# Altium PCB PCB.PcbDoc
Units mm, origin at the board's own origin, x right, y up, seen from the top; angles counter-clockwise.
Board outline 200 x 100 mm, 2 copper layers (Top Layer, Bottom Layer); 48 components, 33 nets, 146 pads, 0 vias.
Unrouted connection lines stored in the file: 95.
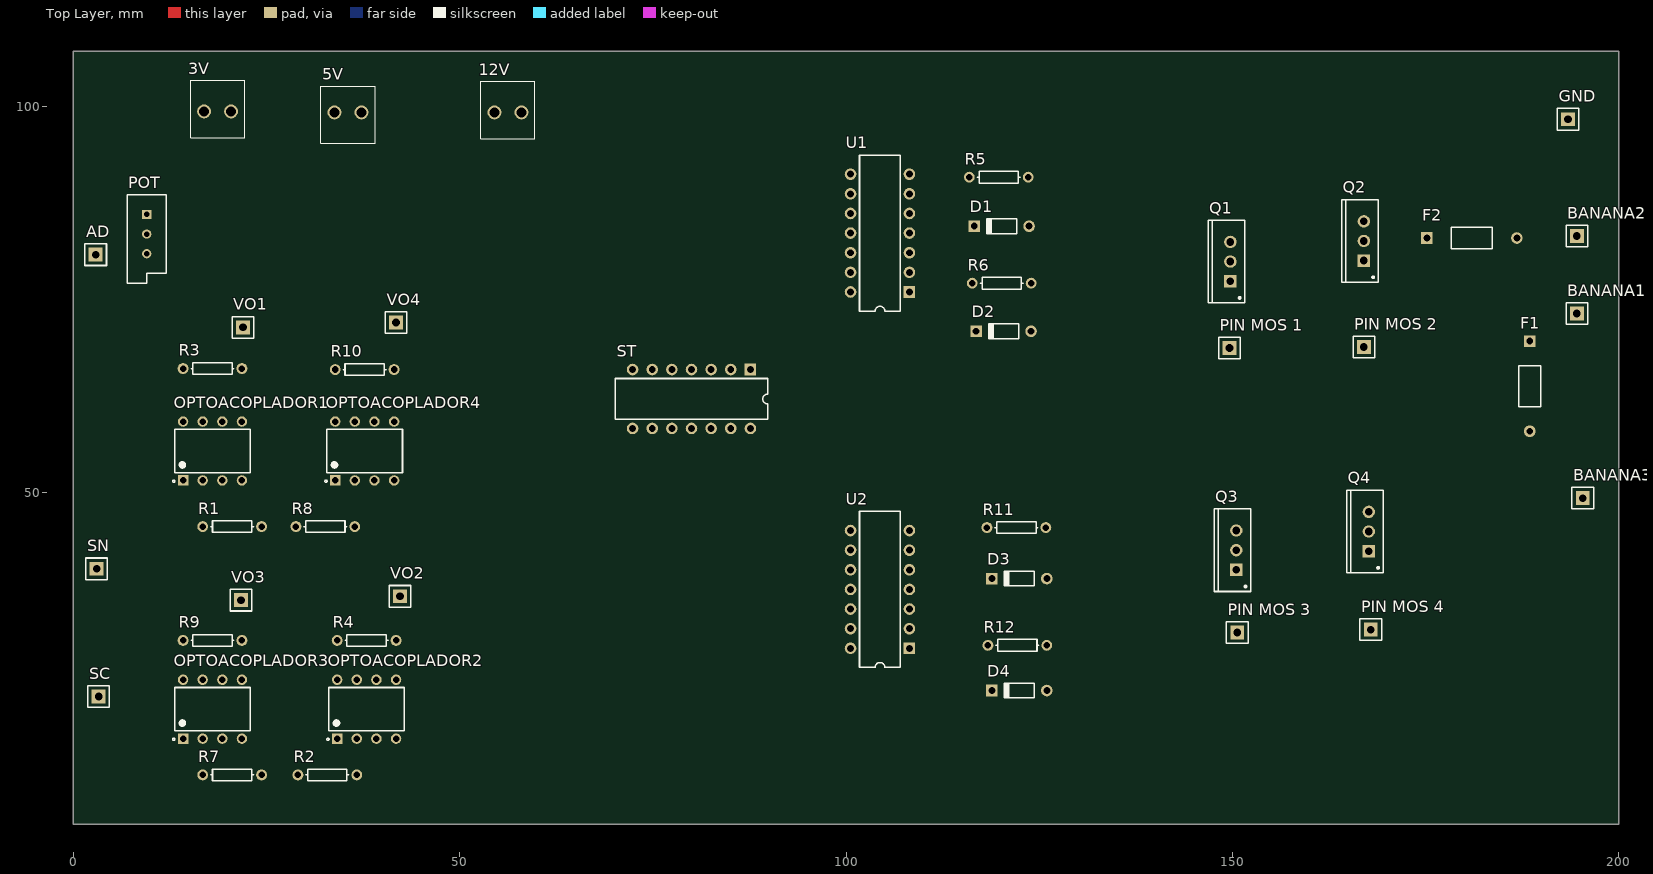
[diagram p0: Top Layer view]
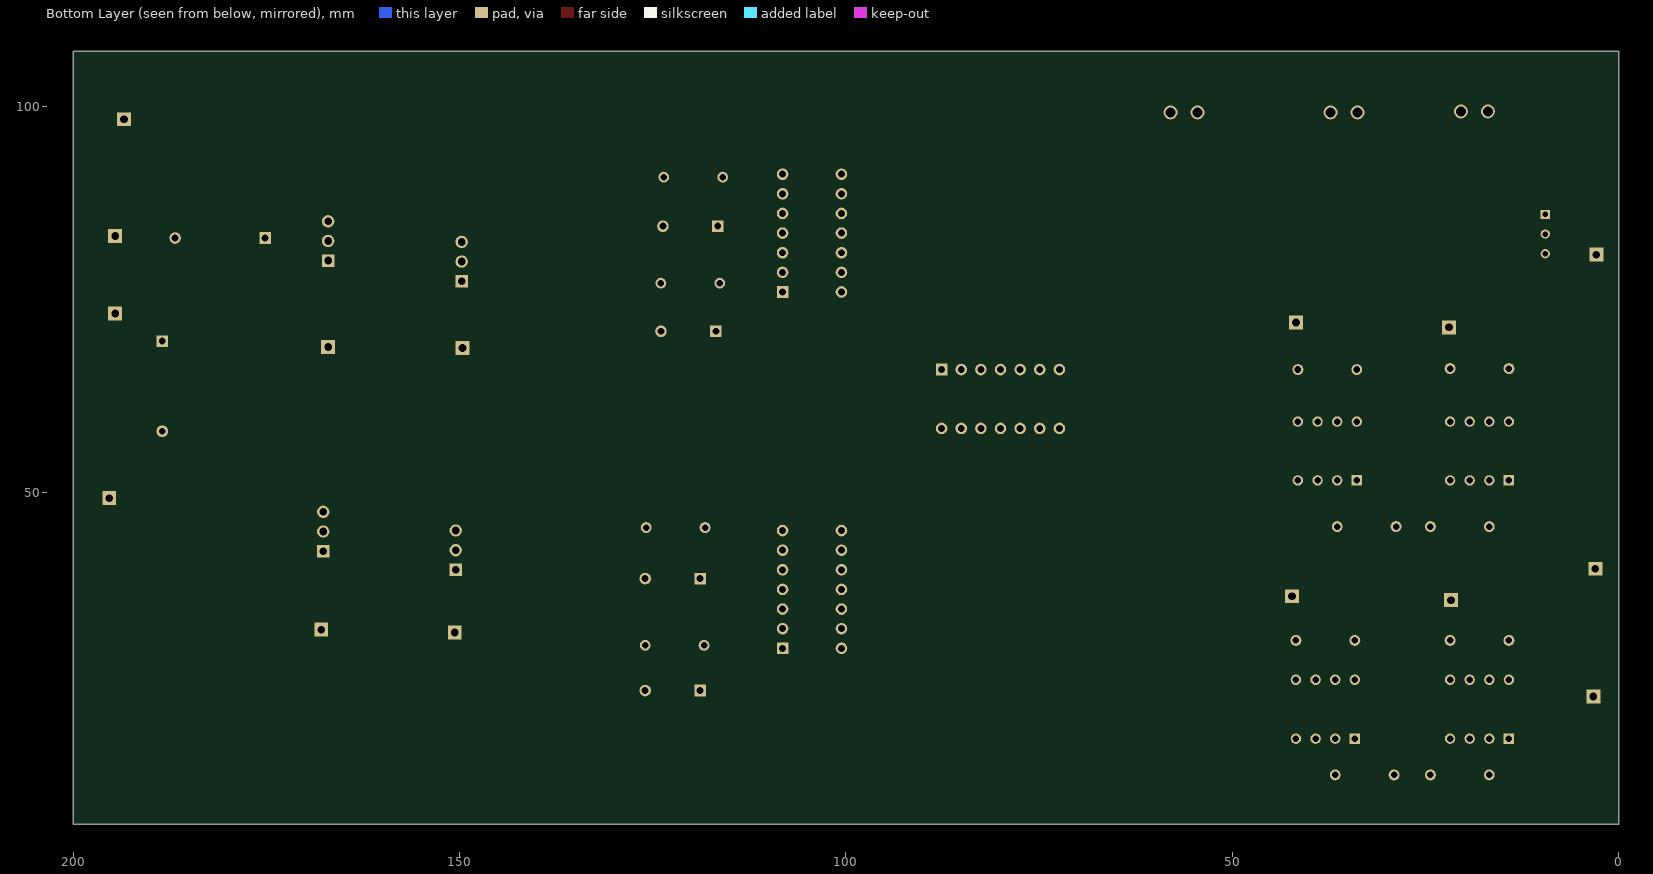
[diagram p1: Bottom Layer view, seen from below]

## Layer stack, top to bottom
Top Solder: solder mask 0.0102, Solder Resist, Dk 3.5
Top Layer: signal copper 0.0356
Dielectric 1: dielectric 0.32, FR-4, Dk 4.8
Bottom Layer: signal copper 0.0356
Bottom Solder: solder mask 0.0102, Solder Resist, Dk 3.5

## Board outline
0,7.112 200,7.112 200,107.112 0,107.112

## Design rules (kind name [scope] priority, off if disabled: settings)
Clearance [All] p1: gap=0.5 ignorepadtopadclearanceinfootprint=FALSE
PolygonConnect [All] p1: connectstyle=Relief reliefconductorwidth=0.254 reliefentries=4 polygonreliefangle="90 Angle" airgapwidth=0.254
RoutingVias [All] p1: holewidth=0.711 width=1.27 viastyle="Through Hole" minholewidth=0.711 minwidth=1.27 maxholewidth=0.711 maxwidth=1.27
SolderMaskExpansion [All] p1: expansion=0.102
Width [All] p1: maxlimit=5 minlimit=0.8 preferedwidth=0.8
30 further rules are at their usual default settings.

## Components (designator, comment, footprint, x,y, rotation, side; value= is the part's Value field where it differs from the comment)
3V "WE-Terminal Blocks Screw Type 691214110002" 691214110002 18.697,99.314 r0 top
5V "WE-Terminal Blocks Screw Type 691214110002" 691214110002 35.56,99.187 r180 top
12V "WE-Terminal Blocks Screw Type 691214110002" 691214110002 56.261,99.187 r0 top
AD "Connector" "1x1x2.54 Pin Header TH V" 2.921,80.772 r0 top
BANANA1 "Connector" "1x1x2.54 Pin Header TH V" 194.564,73.152 r90 top
BANANA2 "Connector" "1x1x2.54 Pin Header TH V" 194.564,83.185 r90 top
BANANA3 "Connector" "1x1x2.54 Pin Header TH V" 195.326,49.276 r90 top
D1 "UF4004" DO-35 120.142,84.455 r180 top
D2 "UF4004" DO-35 120.396,70.866 r180 top
D3 "UF4004" DO-35 122.428,38.862 r180 top
D4 "UF4004" DO-35 122.428,24.384 r180 top
F1 "Fuse 1" PIN-W2/E2.8 188.468,63.754 r270 top
F2 "Fuse 1" PIN-W2/E2.8 180.975,82.931 r0 top
GND "Connector" "1x1x2.54 Pin Header TH V" 193.421,98.298 r0 top
OPTOACOPLADOR1 "6N137" *DIP762W50P254L977H451Q8 18.034,55.372 r90 top
OPTOACOPLADOR2 "6N137" *DIP762W50P254L977H451Q8 37.973,21.971 r90 top
OPTOACOPLADOR3 "6N137" *DIP762W50P254L977H451Q8 18.034,21.971 r90 top
OPTOACOPLADOR4 "6N137" *DIP762W50P254L977H451Q8 37.719,55.372 r90 top
"PIN MOS 1" "Connector" "1x1x2.54 Pin Header TH V" 149.606,68.707 r90 top
"PIN MOS 2" "Connector" "1x1x2.54 Pin Header TH V" 167.005,68.834 r90 top
"PIN MOS 3" "Connector" "1x1x2.54 Pin Header TH V" 150.622,31.877 r90 top
"PIN MOS 4" "Connector" "1x1x2.54 Pin Header TH V" 167.894,32.258 r90 top
POT "RPot" VR5 9.525,83.439 r270 top value=1K
Q1 "IRFZ48" TO-220AB 149.733,79.883 r90 top
Q2 "IRFZ48" TO-220AB 167.005,82.55 r90 top
Q3 "IRFZ48" TO-220AB 150.495,42.545 r90 top
Q4 "IRFZ48" TO-220AB 167.64,44.958 r90 top
R1 "Res1" AXIAL-0.3 20.574,45.593 r180 top value=10K
R2 "Res1" AXIAL-0.3 32.893,13.462 r0 top value=10K
R3 "Res1" AXIAL-0.3 18.034,66.04 r180 top value=10K
R4 "Res1" AXIAL-0.3 37.973,30.861 r180 top value=10K
R5 "Res1" AXIAL-0.3 119.761,90.805 r0 top value=10
R6 "Res1" AXIAL-0.3 120.142,77.089 r0 top value=10
R7 "Res1" AXIAL-0.3 20.574,13.462 r180 top value=10K
R8 "Res1" AXIAL-0.3 32.639,45.593 r0 top value=10K
R9 "Res1" AXIAL-0.3 18.034,30.861 r180 top value=10K
R10 "Res1" AXIAL-0.3 37.719,65.913 r180 top value=10K
R11 "Res1" AXIAL-0.3 122.047,45.466 r0 top value=10
R12 "Res1" AXIAL-0.3 122.174,30.226 r0 top value=10
SC "Connector" "1x1x2.54 Pin Header TH V" 3.302,23.622 r0 top
SN "Connector" "1x1x2.54 Pin Header TH V" 3.048,40.132 r0 top
ST "SN74LS14N" N014 80.01,62.103 r180 top
U1 "IR2110" PDIP14 104.394,83.566 r90 top
U2 "IR2110" PDIP14 104.394,37.465 r90 top
VO1 "Connector" "1x1x2.54 Pin Header TH V" 21.971,71.374 r0 top
VO2 "Connector" "1x1x2.54 Pin Header TH V" 42.291,36.576 r0 top
VO3 "Connector" "1x1x2.54 Pin Header TH V" 21.717,36.068 r0 top
VO4 "Connector" "1x1x2.54 Pin Header TH V" 41.783,72.009 r0 top

## Footprints (in the part's own frame and the unit in brackets; to place one, negate y for a bottom-side part, rotate by r counter-clockwise, add the part's x,y. Pads: shape width x height; smd on the part's side, far side on the other; paste and mask are expansions set on the pad)
"1x1x2.54 Pin Header TH V" [mm] "1x1x2.54 Pin Header TH V"
  rect 1.8x1.8 hole 1: 1(0,0)
  silkscreen extent -1.4,-1.4 1.4,1.4, body extent -1.27,-1.27 1.27,1.27, height 8.55
691214110002 [mm] "3,50mm - Horizontal wire entry - Rising cage clamp - 02p"
  round 1.8 hole 1.3: 1(-1.75,0) 2(1.75,0)
  silkscreen extent -3.5,-3.4 3.5,4, body extent -3.9,-3.4 3.5,4, height 8.51
*DIP762W50P254L977H451Q8 [mm]
  rect 1.35x1.35 hole 0.85: 1(-3.81,3.81)
  round 1.35 hole 0.85: 2(-3.81,1.27) 3(-3.81,-1.27) 4(-3.81,-3.81) 5(3.81,-3.81) 6(3.81,-1.27) 7(3.81,1.27) 8(3.81,3.81)
  silkscreen extent -4.04,-4.9 2.8,5.14
AXIAL-0.3 [mm] "Axial Device, Thru-Hole; 2 Leads; 0.3 in Pin Spacing"
  round 1.4 hole 0.85: 1(-3.81,0) 2(3.81,0)
  silkscreen extent -2.77,-0.76 2.77,0.76
DO-35 [mm] "Diode, Axial; Body 3.8 x 1.9 mm (LxDia. max), Lead Dia. 0.53 mm (max)"
  round 1.5 hole 0.9: 1(-3.55,0)
  rect 1.5x1.5 hole 0.9: 2(3.55,0)
  silkscreen extent -1.95,-0.95 2.05,0.95
N014 [mm] "DIP; 14 Leads; Row Spacing 7.62 mm; Pitch 2.54 mm"
  rect 1.5x1.5 hole 0.9: 1(-7.62,-3.81)
  round 1.5 hole 0.9: 2(-5.08,-3.81) 3(-2.54,-3.81) 4(0,-3.81) 5(2.54,-3.81) 6(5.08,-3.81) 7(7.62,-3.81) 8(7.62,3.81) 9(5.08,3.81) 10(2.54,3.81) 11(0,3.81) 12(-2.54,3.81) 13(-5.08,3.81) 14(-7.62,3.81)
  silkscreen extent -9.85,-2.65 9.85,2.65
PDIP14 [mm] "DIP; 14 Leads; Row Spacing 7.62 mm; Pitch 2.54 mm"
  rect 1.5x1.5 hole 0.9: 1(-7.62,-3.81)
  round 1.5 hole 0.9: 2(-5.08,-3.81) 3(-2.54,-3.81) 4(0,-3.81) 5(2.54,-3.81) 6(5.08,-3.81) 7(7.62,-3.81) 8(7.62,3.81) 9(5.08,3.81) 10(2.54,3.81) 11(0,3.81) 12(-2.54,3.81) 13(-5.08,3.81) 14(-7.62,3.81)
  silkscreen extent -10.1,-2.65 10.1,2.65
PIN-W2/E2.8 [mm] "Thru-Hole; 2 Leads"
  rect 1.5x1.5 hole 0.9: 1(-5.825,0)
  round 1.5 hole 0.9: 2(5.825,0)
  silkscreen extent -2.65,-1.4 2.65,1.4
TO-220AB [mm] "TO, Thru-Hole, Vertical, Heatsink Mounted; 3 In-Line Leads; Pitch 2.54 mm"
  rect 1.6x1.6 hole 1: 1(-2.54,0)
  round 1.6 hole 1: 2(0,0) 3(2.54,0)
  silkscreen extent -5.35,-1.85 5.35,2.85, body extent -5.4,-1.9 5.4,2.9, height 19.3
VR5 [mm] "Thru-Hole; 3 Leads"
  rect 1.2x1.2 hole 0.7: 1(-2.54,0)
  round 1.2 hole 0.7: 2(0,0) 3(2.54,0)
  silkscreen extent -5.08,-2.54 6.35,2.54

## Part data
3V 5V 12V: "WR-TBL Terminal block - serie 2141 - 3.5mm", Manufacturer="Würth Elektronik eiSos GmbH", PartNo=691214110002, ComponentLink1 Description=Manufacturer, ComponentLink1URL=http://www.we-online.com, ComponentLink2 Description=Datasheet, ComponentLink2URL=http://katalog.we-online.de/em/datasheet/6912141100xx.pdf, Created by="Karrer Zheng", Created Date="8 Novenber 2013", NoPins=2
AD BANANA1 BANANA2 BANANA3 GND "PIN MOS 1" "PIN MOS 2" "PIN MOS 3" "PIN MOS 4" SC SN VO1 VO2 VO3 VO4: library part "Header 1x1"
D1 D2 D3 D4: library part FDH333, "High Conductance Low Leakage Diode", Code_JEDEC=DO-204-AH, ComponentLink1Description="Manufacturer Link", ComponentLink1URL=http://www.fairchildsemi.com/, ComponentLink2Description=Datasheet, ComponentLink2URL=http://www.fairchildsemi.com/ds/FD/FDH333.pdf, DatasheetDocument=1997, LatestRevisionDate=17-Jul-2002, LatestRevisionNote="Re-released for DXP Platform.", PackageReference=DO-35, Published=8-Jun-2000, Publisher="Altium Limited"
F1 F2: "Fuse", LatestRevisionDate=17-Jul-2002, LatestRevisionNote="Re-released for DXP Platform.", PackageDescription="Thru-Hole; 2 Leads", PackageReference=PIN-W2/E2.8, Published=8-Jun-2000, Publisher="Altium Limited"
OPTOACOPLADOR1 OPTOACOPLADOR2 OPTOACOPLADOR3 OPTOACOPLADOR4: "High CMR, High Speed TTL Compatible Optocouplers", Package="DIP-8 Broadcom", Digi-Key_Part_Number=751-1262-5-ND, Digi-Key_Purchase_URL=https://www.digikey.ec/product-detail/en/vishay-semiconductor-opto-division/6N137/751-1262-5-ND/1731495?utm_source=snapeda&utm_medium=aggregator&utm_campaign=symbol, MF="Everlight Electronics", MP=6N137, SnapEDA_Link=https://www.snapeda.com/parts/6N137/Everlight%20Electronics%20Co%20Ltd/view-part/?ref=snap
POT: "Potentiometer", LatestRevisionDate=17-Jul-2002, LatestRevisionNote="Re-released for DXP Platform.", PackageDescription="Variable Resistor, Thru-Hole; 3 Leads", PackageReference=VR5, Published=8-Jun-2000, Publisher="Altium Limited", Set Position=0.5, Sim Note="Enter the Resistance value and the set point into parameter fields."
Q1 Q2 Q3 Q4: "HEXFET N-Channel Power MOSFET", ComponentLink1Description="Manufacturer Link", ComponentLink1URL=http://www.irf.com/, ComponentLink2Description=Datasheet, ComponentLink2URL=http://www.irf.com/product-info/datasheets/data/irfz48.pdf, DatasheetVersion=PD-9.758, LatestRevisionDate=17-Jul-2002, LatestRevisionNote="Re-released for DXP Platform.", Note="Pin 2 is electrically connected to pin 4.", PackageDescription="TO, Thru-Hole, Vertical, Heatsink Mounted; 3 In-Line Leads; Pitch 2.54 mm", PackageReference=TO-220AB, PackageVersion=Feb-1997, Published=8-Jun-2000, Publisher="Altium Limited"
R1 R2 R3 R4 R5 R6 R7 R8 R9 R10 R11 R12: "Resistor", LatestRevisionDate=17-Jul-2002, LatestRevisionNote="Re-released for DXP Platform.", PackageDescription="Axial Device, Thru-Hole; 2 Leads; 0.3 in Pin Spacing", PackageReference=AXIAL-0.3, Published=8-Jun-2000, Publisher="Altium Limited"
ST: "Hex Schmitt-Trigger Inverter", ComponentLink1Description="Manufacturer Link", ComponentLink1URL=http://www.ti.com/, ComponentLink2Description=Datasheet, ComponentLink2URL=http://www-s.ti.com/sc/ds/sn74ls14.pdf, DatasheetVersion=Mar-1988, LatestRevisionDate=04-Mar-2005, LatestRevisionNote="Stylized 3D Model Added.", PackageDescription="DIP; 14 Leads; Row Spacing 7.62 mm; Pitch 2.54 mm", PackageReference=N014, PackageVersion=Oct-1995, Published=8-Jun-2000, Publisher="Altium Limited"
U1 U2: "High and Low Side Driver", ComponentLink1Description="Manufacturer Link", ComponentLink1URL=http://www.irf.com/, ComponentLink2Description=Datasheet, ComponentLink2URL=http://www.irf.com/product-info/datasheets/data/ir2110.pdf, DatasheetVersion=PD60147J, LatestRevisionDate=04-Mar-2005, LatestRevisionNote="Stylized 3D Model Added.", Note="Pins 4, 8 and 14 are not connected", PackageDescription="DIP; 14 Leads; Row Spacing 7.62 mm; Pitch 2.54 mm", PackageReference=PDIP14, Published=8-Jun-2000, Publisher="Altium Limited"

## Nets (pads, with @x,y where several pads share a name; then routed paths per layer and width w, separated by ;. In a path a pad name is that pad's centre, name@x,y a point inside that pad or via, vN(x,y) a via of type N, cw(c..) or ccw(c..) an arc to the next point about the centre after c; other vN are vias at no path point)
12V: 12V.2 U1.3 U1.6 U2.3 U2.6
FU1: F1.2 Q1.2 Q3.2
GND: 5V.1 12V.1 GND.1 OPTOACOPLADOR1.5 OPTOACOPLADOR2.5 OPTOACOPLADOR3.5 OPTOACOPLADOR4.5 Q2.3 Q4.3 ST.7 U1.2 U1.11 U1.13 U2.2 U2.11 U2.13
HIN1: ST.2 U1.10
HIN2: ST.6 U2.10
HO1: D1.2 R5.1 U1.7
HO2: D3.2 R11.1 U2.7
LIN1: ST.4 U1.12
LIN2: ST.8 U2.12
LO1: D2.2 R6.1 U1.1
LO2: D4.2 R12.1 U2.1
MH1: "PIN MOS 1.1" D1.1 Q1.1 R5.2
MH2: "PIN MOS 3.1" D3.1 Q3.1 R11.2
ML1: "PIN MOS 2.1" D2.1 Q2.1 R6.2
ML2: "PIN MOS 4.1" D4.1 Q4.1 R12.2
Net3V_1: 3V.1 POT.1
NetAD_1: AD.1 POT.3
NetBANANA1_1: BANANA1.1 F1.1
NetBANANA2_1: BANANA2.1 F2.2
NetOPTOACOPLADOR1_2: OPTOACOPLADOR1.2 R1.2
NetOPTOACOPLADOR2_2: OPTOACOPLADOR2.2 R2.2
NetOPTOACOPLADOR3_2: OPTOACOPLADOR3.2 R7.2
NetOPTOACOPLADOR4_2: OPTOACOPLADOR4.2 R8.2
P3O: 3V.2 OPTOACOPLADOR1.3 OPTOACOPLADOR2.3 OPTOACOPLADOR3.3 OPTOACOPLADOR4.3 POT.2
SC: R2.1 R7.1 SC.1
SN: R1.1 R8.1 SN.1
VCC: 5V.2 OPTOACOPLADOR1.7 OPTOACOPLADOR1.8 OPTOACOPLADOR2.7 OPTOACOPLADOR2.8 OPTOACOPLADOR3.7 OPTOACOPLADOR3.8 OPTOACOPLADOR4.7 OPTOACOPLADOR4.8 R3.2 R4.2 R9.2 R10.2 ST.14 U1.9 U2.9
VO1: OPTOACOPLADOR1.6 R3.1 ST.1 VO1.1
VO2: OPTOACOPLADOR2.6 R4.1 ST.3 VO2.1
VO3: OPTOACOPLADOR3.6 R9.1 ST.5 VO3.1
VO4: OPTOACOPLADOR4.6 R10.1 ST.9 VO4.1
VS1: F2.1 Q1.3 Q2.2 U1.5
VS2: BANANA3.1 Q3.3 Q4.2 U2.5
pads on no net: OPTOACOPLADOR1.1 OPTOACOPLADOR1.4 OPTOACOPLADOR2.1 OPTOACOPLADOR2.4 OPTOACOPLADOR3.1 OPTOACOPLADOR3.4 OPTOACOPLADOR4.1 OPTOACOPLADOR4.4 ST.10 ST.11 ST.12 ST.13 U1.4 U1.8 U1.14 U2.4 U2.8 U2.14

## Silkscreen, mask and mechanical layers (free items; w line width, h text height)
Mechanical 1:
  lines w0.254: 0,0 200,0 200,100 0,100 0,0